# Altium PCB SC-70-5_L2.1-W1.3-P0.65-LS2.1-BR_2021-01-09.pcbdoc
Units mm, origin at the board's own origin, x right, y up, seen from the top; angles counter-clockwise.
Board outline 32.66 x 28.33 mm, 2 copper layers (Top Layer, Bottom Layer); 1 components, 0 nets, 5 pads, 0 vias.
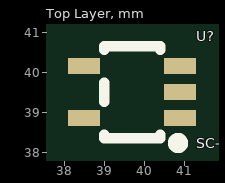
[diagram p0: Top Layer view]
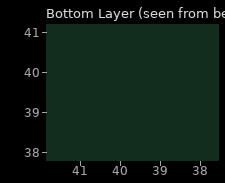
[diagram p1: Bottom Layer view, seen from below]

## Layer stack, top to bottom
Top Layer: signal copper (thickness not stored)
Dielectric: dielectric 0.32, FR-4, Dk 4.8
Bottom Layer: signal copper (thickness not stored)

## Board outline
58.064,25.4 25.4,25.4 25.4,53.728 58.064,53.728

## Components (designator, comment, footprint, x,y, rotation, side; value= is the part's Value field where it differs from the comment)
U? "SC-70-5_L2.1-W1.3-P0.65-LS2.1-BR" SC-70-5_L2.1-W1.3-P0.65-LS2.1-BR 39.7,39.437 r0 top

## Footprints (in the part's own frame and the unit in brackets; to place one, negate y for a bottom-side part, rotate by r counter-clockwise, add the part's x,y. Pads: shape width x height; smd on the part's side, far side on the other; paste and mask are expansions set on the pad)
SC-70-5_L2.1-W1.3-P0.65-LS2.1-BR [mm]
  rect 0.8x0.4 smd: 1(1.2,-0.59) 2(1.2,0.06) 3(1.2,0.71) 4(-1.2,0.71) 5(-1.2,-0.59)
  silkscreen extent -0.7,-1.34 1.27,1.21

## Nets (pads, with @x,y where several pads share a name; then routed paths per layer and width w, separated by ;. In a path a pad name is that pad's centre, name@x,y a point inside that pad or via, vN(x,y) a via of type N, cw(c..) or ccw(c..) an arc to the next point about the centre after c; other vN are vias at no path point)
pads on no net: U?.1 U?.2 U?.3 U?.4 U?.5

## Silkscreen, mask and mechanical layers (free items; w line width, h text height)
Document:
  lines w0.003: 41.707,39.539 41.757,39.589